# Altium PCB 400432.PcbDoc (part 7 of 7)
Units mm, origin at the board's own origin, x right, y up, seen from the top; angles counter-clockwise.
Board outline 136.53 x 63.5 mm, 4 copper layers (Top Layer, Mid-Layer 1, Mid-Layer 2, Bottom Layer), stack 1.505 mm thick; 354 components, 245 nets, 1470 pads, 1957 vias.
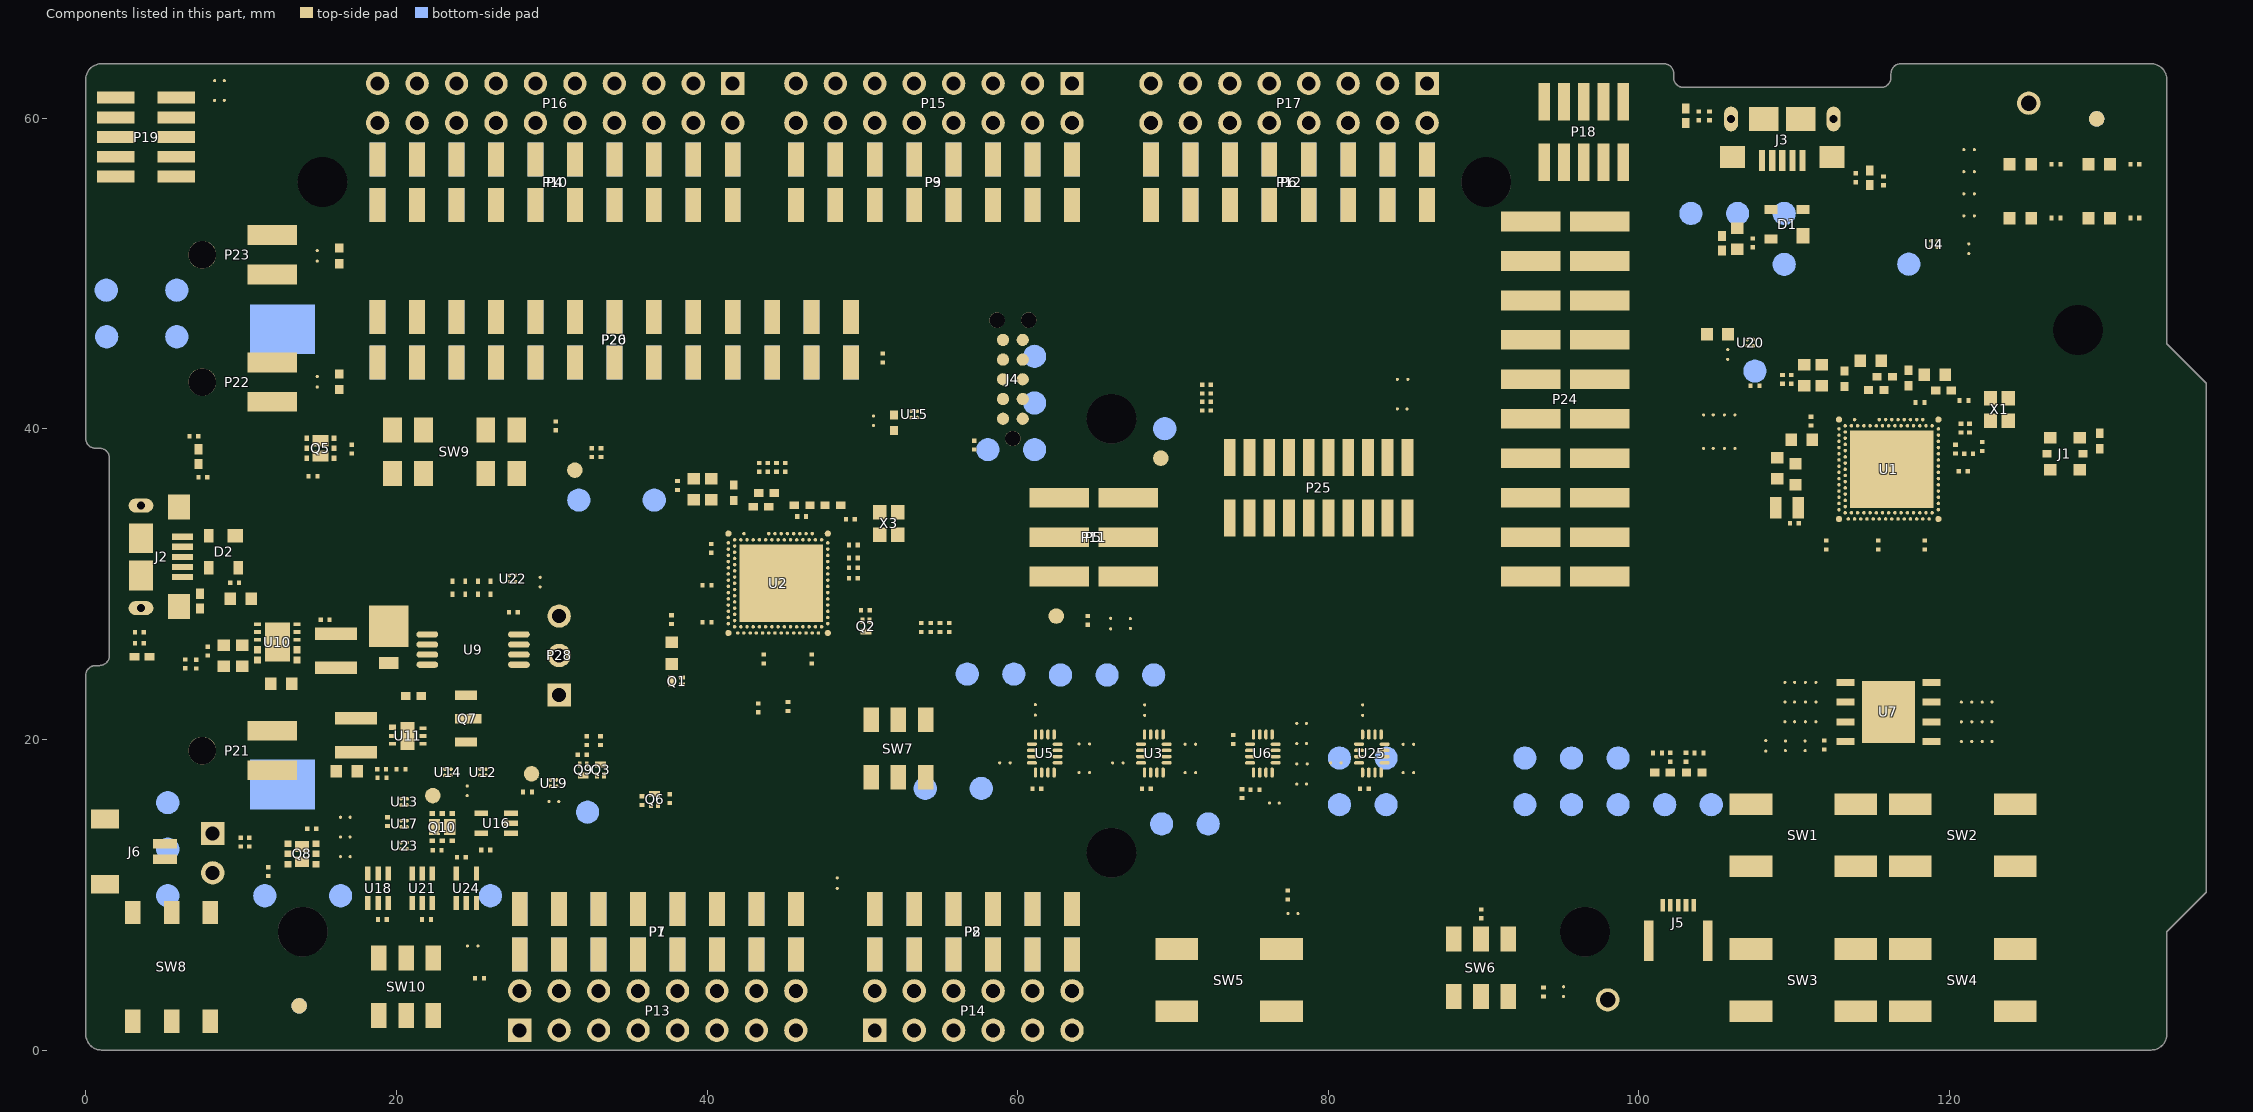
[diagram p8: the components of this part, seen from the top]

## Silkscreen, mask and mechanical layers (free items; w line width, h text height) (continued)
Bottom Overlay:
  drawing of 1258 lines, arcs and shapes, not listed
  text "www.segger.com" at 90.254,62.989 h1.68 r180
  text "J-Link" at 90.173,61.839 h1.45 r180
  text "Technology" at 94.925,61.839 h1.45 r180
  text "TM" at 93.642,61.417 h0.94 r180
  text "S" at 93.856,59.98 h1.35 r180
  text "E" at 94.745,59.98 h1.35 r180
  text "G" at 95.529,59.98 h1.35 r180
  text "G" at 96.52,59.98 h1.35 r180
  text "E" at 97.544,59.98 h1.35 r180
  text "R" at 98.379,59.98 h1.35 r180
  text "P1.03" at 19.303,53.111 h1.65 r90
  text "P1.02" at 21.843,53.111 h1.65 r90
  text "P0.27" at 24.383,53.111 h1.65 r90
  text "GND" at 26.924,53.111 h1.65 r90
  text "P1.15" at 29.463,53.111 h1.65 r90
  text "P1.14" at 32.003,53.111 h1.65 r90
  text "P1.13" at 34.543,53.111 h1.65 r90
  text "P1.12" at 37.083,53.111 h1.65 r90
  text "P1.11" at 39.623,53.111 h1.65 r90
  text "P1.10" at 42.163,53.111 h1.65 r90
  text "P1.09" at 46.227,53.111 h1.65 r90
  text "P1.08 (D6)" at 48.59,53.111 h1.65 r90
  text "P1.07 (D5)" at 51.308,53.111 h1.65 r90
  text "P1.06 (D4)" at 53.848,53.111 h1.65 r90
  text "P1.05 (D3)" at 56.388,53.111 h1.65 r90
  text "P1.04 (D2)" at 58.928,53.111 h1.65 r90
  text "P1.01 (D1)" at 61.468,53.111 h1.65 r90
  text "P1.00 (ARDUINO D0)" at 64.008,53.111 h1.65 r90
  text "P0.10" at 69.088,53.111 h1.78 r90
  text "P0.09" at 71.628,53.111 h1.78 r90
  text "P0.08" at 74.168,53.111 h1.78 r90
  text "P0.07" at 76.708,53.111 h1.78 r90
  text "P0.03" at 79.248,53.111 h1.78 r90
  text "P0.02" at 81.788,53.111 h1.78 r90
  text "P0.01" at 84.328,53.111 h1.78 r90
  text "P0.00" at 86.843,53.111 h1.78 r90
  text "(SCL)" at 20.421,52.07 h1.65 r90
  text "(SDA)" at 22.961,52.07 h1.65 r90
  text "(AREF)" at 25.501,52.07 h1.65 r90
  text "(D13)" at 30.581,52.07 h1.65 r90
  text "(D12)" at 33.121,52.07 h1.65 r90
  text "(D11)" at 35.661,52.07 h1.65 r90
  text "(D10)" at 38.201,52.07 h1.65 r90
  text "(D9)" at 40.741,52.07 h1.65 r90
  text "(D8)" at 43.281,52.07 h1.65 r90
  text "(D7)" at 47.345,52.07 h1.65 r90
  text "P0.16" at 75.654,48.58 h1.91 r180
  text "DIO3" at 82.813,48.58 h1.91 r180
  text "SB10/20" at 89.065,48.58 h1.91 r180
  text "P0.15" at 75.654,45.888 h1.91 r180
  text "DIO2" at 82.819,45.888 h1.91 r180
  text "SB15/25" at 89.065,45.888 h1.91 r180
  text "GPIO" at 121.549,44.265 h1.78 r180
  text "0R" at 125.705,43.993 h1.27 r180
  text "GPIO" at 96.368,43.424 h1.78 r180
  text "MEM" at 101.041,43.424 h1.78 r180
  text "P0.14" at 75.654,43.195 h1.91 r180
  text "DIO1" at 82.915,43.195 h1.91 r180
  text "SB14/24" at 89.065,43.195 h1.91 r180
  text "NFC2" at 114.002,43.155 h1.91 r180
  text "P0.03" at 107.036,43.129 h1.91 r180
  text "N.C" at 122.657,41.199 h1.27 r180
  text "SB1x" at 99.238,41.138 h1.27 r180
  text "P0.13" at 75.654,40.503 h1.91 r180
  text "DIO0" at 82.818,40.503 h1.91 r180
  text "SB12/22" at 89.065,40.503 h1.91 r180
  text "NFC" at 126.705,40.292 h1.78 r180
  text "P0.09" at 24.078,40.018 h1.91 r180
  text "Button 4" at 29.754,40.018 h1.91 r180
  text "PIN" at 101.93,38.979 h1.78 r180
  text "SB2x" at 99.238,38.852 h1.27 r180
  text "NFC1" at 114.098,38.583 h1.91 r180
  text "P0.02" at 107.036,38.557 h1.91 r180
  text "P0.17" at 75.654,37.81 h1.91 r180
  text "CLK" at 82.994,37.81 h1.91 r180
  text "SB11/21" at 89.065,37.81 h1.91 r180
  text "P0.08" at 24.078,37.326 h1.91 r180
  text "Button 3" at 29.771,37.326 h1.91 r180
  text "PIN" at 123.759,37.218 h1.78 r180
  text "P0.18" at 75.654,35.118 h1.91 r180
  text "CS" at 83.602,35.118 h1.91 r180
  text "SB13/23" at 89.065,35.118 h1.91 r180
  text "SWDCLK" at 109.601,35.001 h1.91 r180
  text "P0.24" at 24.078,34.634 h1.91 r180
  text "Button 2" at 29.777,34.634 h1.91 r180
  text "P0.31" at 75.654,32.426 h1.91 r180
  text "LED 4" at 82.373,32.426 h1.91 r180
  text "SB8" at 89.624,32.426 h1.91 r180
  text "SWDIO" at 110.49,32.311 h1.91 r180
  text "P0.23" at 24.078,31.941 h1.91 r180
  text "Button 1" at 29.873,31.941 h1.91 r180
  text "P0.30" at 75.654,29.733 h1.91 r180
  text "LED 3" at 82.39,29.733 h1.91 r180
  text "SB7" at 89.624,29.733 h1.91 r180
  text "RESET" at 110.566,29.621 h1.91 r180
  text "SB4" at 38.048,29.249 h1.91 r180
  text "P0.01" at 24.078,27.903 h1.91 r180
  text "XL2" at 31.608,27.903 h1.91 r180
  text "P0.29" at 75.654,27.041 h1.91 r180
  text "LED 2" at 82.396,27.041 h1.91 r180
  text "SB6" at 89.624,27.041 h1.91 r180
  text "GPIO" at 44.792,26.854 h1.78 r180
  text "P0.11" at 107.036,26.848 h1.91 r180
  text "SWO" at 114.428,26.848 h1.91 r180
  text "SB2" at 38.048,26.556 h1.91 r180
  text "VDD" at 101.168,25.212 h1.78 r180
  text "IF / MCU" at 120.752,24.74 h1.78 r180
  text "P0.28" at 75.654,24.348 h1.91 r180
  text "LED 1" at 82.492,24.348 h1.91 r180
  text "SB5" at 89.624,24.348 h1.91 r180
  text "RXD" at 114.428,24.187 h1.91 r180
  text "P1.00" at 107.036,24.165 h1.91 r180
  text "SB3" at 38.048,23.864 h1.91 r180
  text "P0.00" at 24.078,22.518 h1.91 r180
  text "XL1" at 31.704,22.518 h1.91 r180
  text "PIN" at 50.355,22.346 h1.78 r180
  text "GPIO" at 75.594,21.859 h1.99 r180
  text "Function" at 81.064,21.859 h1.99 r180
  text "Short" at 90.14,21.859 h1.99 r180
  text "HW" at 98.776,21.859 h1.99 r180
  text "P0.10" at 107.036,21.482 h1.91 r180
  text "CTS" at 114.428,21.482 h1.91 r180
  text "SB1" at 38.048,21.172 h1.91 r180
  text "IF OFF" at 127.61,20.066 h1.78 r180
  text "TXD" at 114.428,18.821 h1.91 r180
  text "P1.01" at 107.036,18.799 h1.91 r180
  text "GPIO" at 24.019,18.682 h1.99 r180
  text "Function" at 29.489,18.682 h1.99 r180
  text "Short" at 38.565,18.682 h1.99 r180
  text "HW" at 47.201,18.682 h1.99 r180
  text "P0.11" at 107.036,16.116 h1.91 r180
  text "RTS" at 114.428,16.116 h1.91 r180
  text "GPIO" at 121.006,16.104 h1.78 r180
  text "P0.04 (A0)" at 51.181,16.019 h1.65 r90
  text "P0.05 (A1)" at 52.984,16.019 h1.65 r90
  text "P0.06 (A2)" at 56.261,16.019 h1.65 r90
  text "P0.07 (A3)" at 58.801,16.019 h1.65 r90
  text "P0.25 (A4)" at 61.335,16.019 h1.65 r90
  text "P0.26 (A5)" at 63.881,16.019 h1.65 r90
  text "RESET" at 33.522,14.272 h1.65 r90
  text "RXD" at 114.428,13.456 h1.91 r180
  text "P0.22" at 107.036,13.433 h1.91 r180
  text "GND" at 43.605,13.103 h1.65 r90
  text "GND" at 41.142,12.95 h1.65 r90
  text "N.C." at 46.272,12.95 h1.78 r90
  text "VDD" at 28.448,12.87 h1.65 r90
  text "VDD" at 30.988,12.87 h1.65 r90
  text "VDD" at 36.068,12.87 h1.65 r90
  text "5V" at 38.633,11.828 h1.65 r90
  text "P0.21" at 107.036,10.751 h1.91 r180
  text "CTS" at 114.428,10.751 h1.91 r180
  text "TXD" at 114.428,8.09 h1.91 r180
  text "P0.20" at 107.036,8.068 h1.91 r180
  text "P0.19" at 107.036,5.385 h1.91 r180
  text "RTS" at 114.428,5.385 h1.91 r180
  text "HW" at 120.371,3.296 h1.99 r180
  text "GPIO" at 107.014,2.896 h1.99 r180
  text "Function" at 112.484,2.896 h1.99 r180
Board Outline:
  lines w0.254: 82.093,0 97.36,0 132.969,0 ccw(c132.969,1.016) 133.985,1.016 133.985,7.62 136.525,10.16 136.525,42.926 133.985,45.466 133.985,62.484 ccw(c132.969,62.484) 132.969,63.5 116.859,63.5 ccw(c116.859,62.865) 116.224,62.865 116.224,62.611 cw(c115.589,62.611) 115.589,61.976 102.869,61.976 cw(c102.869,62.611) 102.234,62.611 102.234,62.865 ccw(c101.599,62.865) 101.599,63.5 1.016,63.5 ccw(c1.016,62.484) 0,62.484 0,39.38 ccw(c0.635,39.38) 0.635,38.745 0.889,38.745 cw(c0.889,38.11) 1.524,38.11 1.524,25.39 cw(c0.889,25.39) 0.889,24.755 0.635,24.755 ccw(c0.635,24.12) 0,24.12 0,1.016 ccw(c1.016,1.016) 1.016,0 82.099,0
Mechanical 4:
  lines w0.165: 6.232,31.75 6.253,31.75 cw(c6.253,29.378) 7.93,31.055 ; 6.232,32.4 ccw(c6.232,34.797) 7.927,33.102 7.93,33.105 8.238,32.797 ccw(c9.601,34.161) 9.601,32.233 ; 15.173,33.494 cw(c15.989,32.678) 15.989,33.832 32.91,33.832 ; 37.513,38.513 cw(c38.749,37.276) 38.739,39.025 43.409,39.025 ; 37.516,38.51 33.579,34.573 cw(c32.656,35.496) 32.656,34.191 ; 37.689,38.076 cw(c38.926,36.84) 38.915,38.588 43.279,38.588 ; 37.692,38.074 33.833,34.214 cw(c32.91,35.137) 32.91,33.832 ; 43.292,38.588 cw(c43.279,37.233) 44.634,37.226 ; 43.409,39.018 cw(c43.393,37.27) 45.141,37.262 ; 44.633,37.215 ccw(c45.095,37.198) 44.882,36.787 cw(c44.745,36.346) 45.207,36.329 ; 108.506,54.11 108.603,54.013 cw(c106.807,52.217) 109.347,52.217 109.347,43.71 cw(c109,43.71) 109.245,43.465 ; 108.529,54.1 109.075,54.646 ; 109.075,54.645 ccw(c108.716,55.005) 109.224,55.005 109.224,57.506 ; 109.245,42.895 cw(c109,42.65) 109.347,42.65 109.347,42.443 ccw(c110.254,42.443) 109.613,41.802 ccw(c111.13,43.319) 111.13,41.173 112.421,41.173 cw(c112.421,40.133) 113.157,40.869 cw(c112.866,40.577) 113.278,40.577 113.278,40.189 113.284,40.195 ; 109.804,42.895 ccw(c110.05,42.65) 109.703,42.65 109.703,42.443 ccw(c110.254,42.443) 109.864,42.053 ccw(c111.13,43.32) 111.13,41.529 112.421,41.529 cw(c112.421,40.133) 113.408,41.12 cw(c113.034,40.746) 113.563,40.746 113.563,40.465 ccw(c113.953,40.465) 113.678,40.189 ; 109.804,43.465 cw(c110.049,43.71) 109.703,43.71 109.703,50.578 109.703,52.205 cw(c112.243,52.205) 110.447,54.001 110.556,54.11 110.021,54.645 cw(c110.38,55.005) 109.872,55.005 109.872,57.515 ; 7.93,31.055 8.151,31.276 cw(c9.601,29.826) 9.601,31.877 12.357,31.877 ccw(c12.357,34.767) 14.401,32.724 14.793,33.116 ; 7.93,31.055 7.93,31.055 ; 9.601,32.233 12.355,32.233 ccw(c12.355,34.773) 14.151,32.977 14.588,33.414 ; 9.601,32.233 9.601,32.233 ; 14.588,33.414 14.588,33.414 ; 14.588,33.414 14.84,33.666 cw(c16.106,32.4) 16.106,34.191 32.656,34.191 ; 14.793,33.116 14.793,33.116 ; 14.793,33.116 15.102,33.425 cw(c16.063,32.464) 15.107,33.43 ; 15.107,33.43 15.107,33.43 ; 32.656,34.191 32.656,34.191 ; 32.91,33.832 32.91,33.832
  lines w0.762: 120.778,38.389 126.261,38.389
  text "90ohm differensial impedance" at 97.307,57.785 h1.02
  text "50ohm impedance" at 118.77,39.345 h1.02
  text "90ohm differensial impedance" at 16.053,32.004 h1.02
Top Assembly:
  circle w0.1: c128.27,46.355 r1.6
  circle w0.1: c96.52,7.62 r1.6
  circle w0.1: c66.04,12.7 r1.6
  circle w0.1: c13.97,7.62 r1.6
  circle w0.1: c15.24,55.88 r1.6
  circle w0.1: c66.04,40.64 r1.6
  circle w0.1: c90.17,55.88 r1.6
  lines w0.254: 78.867,6.502 86.867,6.502 86.867,14.502 78.867,14.502 78.867,6.502 ; 87.427,14.681 99.427,14.681 99.427,26.681 87.427,26.681 87.427,14.681
Bottom Assembly:
  drawing of 47 lines, arcs and shapes, not listed
  text "Bat1" at 11.709,49.301 h0.64 r180
  text "+" at 15.088,15.35 h1.78
Mechanical 24:
  lines w0.165: 6.232,31.75 6.253,31.75 cw(c6.253,29.378) 7.93,31.055 ; 6.232,32.4 ccw(c6.232,34.797) 7.927,33.102 7.93,33.105 8.238,32.797 ccw(c9.601,34.161) 9.601,32.233 ; 15.173,33.494 cw(c15.989,32.678) 15.989,33.832 32.91,33.832 ; 37.513,38.513 cw(c38.749,37.276) 38.739,39.025 43.409,39.025 ; 37.516,38.51 33.579,34.573 cw(c32.656,35.496) 32.656,34.191 ; 37.689,38.076 cw(c38.926,36.84) 38.915,38.588 43.279,38.588 ; 37.692,38.074 33.833,34.214 cw(c32.91,35.137) 32.91,33.832 ; 43.292,38.588 cw(c43.279,37.233) 44.634,37.226 ; 43.409,39.018 cw(c43.393,37.27) 45.141,37.262 ; 44.633,37.215 ccw(c45.095,37.198) 44.882,36.787 cw(c44.745,36.346) 45.207,36.329 ; 108.506,54.11 108.603,54.013 cw(c106.807,52.217) 109.347,52.217 109.347,43.71 cw(c109,43.71) 109.245,43.465 ; 108.529,54.1 109.075,54.646 ; 109.075,54.645 ccw(c108.716,55.005) 109.224,55.005 109.224,57.506 ; 109.245,42.895 cw(c109,42.65) 109.347,42.65 109.347,42.443 ccw(c110.254,42.443) 109.613,41.802 ccw(c111.13,43.319) 111.13,41.173 112.421,41.173 cw(c112.421,40.133) 113.157,40.869 cw(c112.866,40.577) 113.278,40.577 113.278,40.189 113.284,40.195 ; 109.804,42.895 ccw(c110.05,42.65) 109.703,42.65 109.703,42.443 ccw(c110.254,42.443) 109.864,42.053 ccw(c111.13,43.32) 111.13,41.529 112.421,41.529 cw(c112.421,40.133) 113.408,41.12 cw(c113.034,40.746) 113.563,40.746 113.563,40.465 ccw(c113.953,40.465) 113.678,40.189 ; 109.804,43.465 cw(c110.049,43.71) 109.703,43.71 109.703,50.578 109.703,52.205 cw(c112.243,52.205) 110.447,54.001 110.556,54.11 110.021,54.645 cw(c110.38,55.005) 109.872,55.005 109.872,57.515 ; 7.93,31.055 8.151,31.276 cw(c9.601,29.826) 9.601,31.877 12.357,31.877 ccw(c12.357,34.767) 14.401,32.724 14.793,33.116 ; 7.93,31.055 7.93,31.055 ; 9.601,32.233 12.355,32.233 ccw(c12.355,34.773) 14.151,32.977 14.588,33.414 ; 9.601,32.233 9.601,32.233 ; 14.588,33.414 14.588,33.414 ; 14.588,33.414 14.84,33.666 cw(c16.106,32.4) 16.106,34.191 32.656,34.191 ; 14.793,33.116 14.793,33.116 ; 14.793,33.116 15.102,33.425 cw(c16.063,32.464) 15.107,33.43 ; 15.107,33.43 15.107,33.43 ; 32.656,34.191 32.656,34.191 ; 32.91,33.832 32.91,33.832
  lines w0.762: 120.778,38.389 126.261,38.389
  text "90ohm differensial impedance" at 97.307,57.785 h1.02
  text "50ohm impedance" at 118.77,39.345 h1.02
  text "90ohm differensial impedance" at 16.053,32.004 h1.02

## Dimensions
132.969,62.484 to 136.175,65.69 on Mechanical 3
0,1.016 to 90.17,55.88 on Mechanical 3
0,1.016 to 133.985,1.016 on Mechanical 3
0,1.016 to 136.525,10.16 on Mechanical 3
0,1.016 to 13.97,7.62 on Mechanical 3
0,1.016 to 15.24,55.88 on Mechanical 3
0,1.016 to 66.04,12.7 on Mechanical 3
0,1.016 to 96.52,7.62 on Mechanical 3
132.969,0 to 101.599,63.5 on Mechanical 3
132.969,0 to 96.52,7.62 on Mechanical 3
132.969,0 to 66.04,12.7 on Mechanical 3
132.969,0 to 66.04,40.64 on Mechanical 3
132.969,0 to 15.24,55.88 on Mechanical 3
132.969,0 to 128.27,46.355 on Mechanical 3
0,1.016 to 128.27,46.355 on Mechanical 3

## Text inside footprints (layer, text, board x,y; h text height)
Bat1: Bottom Overlay "+" at 14.775,15.65 h1.78 r270
P18: Top Overlay "1" at 93.744,54.656 h1.02
P19: Top Overlay "1" at 7.569,55.728 h1.02
P25: Top Overlay "1" at 84.887,39.599 h1.02
SW9: Top Overlay "NN" at 29.449,37.656 h1.02 r90
U1: Top Component Info "AG1" at 112.537,35.149 h0.08; Top Component Info "AJ1" at 112.537,34.749 h0.08; Top Component Info "AH2" at 112.87,34.949 h0.08; Top Component Info "AK4" at 113.569,34.349 h0.08; Top Component Info "AL5" at 113.763,33.949 h0.08; Top Component Info "AK2" at 113.169,34.375 h0.08; Top Component Info "AL3" at 113.363,33.949 h0.08; Top Component Info "V2" at 112.95,36.949 h0.08; Top Component Info "Y2" at 112.95,36.549 h0.08; Top Component Info "AA1" at 112.543,36.349 h0.08; Top Component Info "W1" at 112.609,36.749 h0.08; Top Component Info "AD2" at 112.87,35.749 h0.08; Top Component Info "AC1" at 112.537,35.949 h0.08; Top Component Info "AE1" at 112.556,35.549 h0.08; Top Component Info "AB2" at 112.87,36.149 h0.08; Top Component Info "H2" at 112.95,38.949 h0.08; Top Component Info "J1" at 112.609,38.749 h0.08; Top Component Info "G1" at 112.609,39.149 h0.08; Top Component Info "M2" at 112.95,38.149 h0.08; Top Component Info "L1" at 112.589,38.349 h0.08; Top Component Info "P2" at 112.95,37.749 h0.08; Top Component Info "R1" at 112.622,37.549 h0.08; Top Component Info "N1" at 112.628,37.949 h0.08; Top Component Info "K2" at 112.95,38.549 h0.08; Top Component Info "D2" at 112.95,39.749 h0.08; Top Component Info "E1" at 112.628,39.549 h0.08; Top Component Info "C1" at 112.609,39.949 h0.08; Top Component Info "B4" at 113.609,40.35 h0.08; Top Component Info "A5" at 113.805,40.749 h0.08; Top Component Info "B2" at 113.224,40.336 h0.08; Top Component Info "AK14" at 115.54,34.349 h0.08; Top Component Info "AL13" at 115.333,33.949 h0.08; Top Component Info "AK10" at 114.74,34.349 h0.08; Top Component Info "AL11" at 114.933,33.949 h0.08; Top Component Info "AK12" at 115.14,34.349 h0.08; Top Component Info "AK8" at 114.369,34.35 h0.08; Top Component Info "AL7" at 114.163,33.949 h0.08; Top Component Info "AL9" at 114.533,33.949 h0.08; Top Component Info "AL15" at 115.733,33.949 h0.08; Top Component Info "B14" at 115.579,40.35 h0.08; Top Component Info "A13" at 115.376,40.749 h0.08; Top Component Info "B10" at 114.779,40.35 h0.08; Top Component Info "B12" at 115.179,40.35 h0.08; Top Component Info "B8" at 114.409,40.35 h0.08; Top Component Info "A15" at 115.776,40.749 h0.08; Top Component Info "AK24" at 117.54,34.349 h0.08; Top Component Info "AL23" at 117.333,33.949 h0.08; Top Component Info "AL25" at 117.733,33.949 h0.08; Top Component Info "AK20" at 116.74,34.349 h0.08; Top Component Info "AL21" at 116.933,33.949 h0.08; Top Component Info "AK18" at 116.34,34.35 h0.08; Top Component Info "AL17" at 116.133,33.949 h0.08; Top Component Info "AL19" at 116.533,33.949 h0.08; Top Component Info "AK22" at 117.14,34.349 h0.08; Top Component Info "B24" at 117.579,40.35 h0.08; Top Component Info "A23" at 117.376,40.749 h0.08; Top Component Info "A25" at 117.776,40.749 h0.08; Top Component Info "B20" at 116.779,40.35 h0.08; Top Component Info "A21" at 116.976,40.749 h0.08; Top Component Info "B18" at 116.379,40.35 h0.08; Top Component Info "A17" at 116.176,40.749 h0.08; Top Component Info "A19" at 116.576,40.749 h0.08; Top Component Info "B22" at 117.179,40.35 h0.08; Top Component Info "AL29" at 118.533,33.949 h0.08; Top Component Info "AL27" at 118.133,33.949 h0.08; Top Component Info "AK28" at 118.34,34.35 h0.08; Top Component Info "AG31" at 119.4,35.149 h0.08; Top Component Info "AJ31" at 119.4,34.749 h0.08; Top Component Info "AK30" at 118.74,34.349 h0.08; Top Component Info "U31" at 119.4,37.149 h0.08; Top Component Info "AA31" at 119.4,36.349 h0.08; Top Component Info "W31" at 119.4,36.749 h0.08; Top Component Info "AC31" at 119.4,35.949 h0.08; Top Component Info "AE31" at 119.4,35.549 h0.08; Top Component Info "J31" at 119.4,38.749 h0.08; Top Component Info "G31" at 119.4,39.149 h0.08; Top Component Info "L31" at 119.4,38.349 h0.08; Top Component Info "R31" at 119.4,37.549 h0.08; Top Component Info "N31" at 119.4,37.949 h0.08; Top Component Info "E31" at 119.4,39.549 h0.08; Top Component Info "C31" at 119.4,39.949 h0.08; Top Component Info "B30" at 118.779,40.35 h0.08; Top Component Info "A27" at 118.176,40.749 h0.08; Top Component Info "B28" at 118.379,40.35 h0.08; Top Component Info "AF2" at 112.87,35.349 h0.08; Top Component Info "F2" at 112.95,39.349 h0.08; Top Component Info "T2" at 112.95,37.349 h0.08; Top Component Info "AK6" at 113.969,34.35 h0.08; Top Component Info "B6" at 114.009,40.35 h0.08; Top Component Info "AK26" at 117.94,34.35 h0.08; Top Component Info "AK16" at 115.94,34.35 h0.08; Top Component Info "B26" at 117.979,40.35 h0.08; Top Component Info "B16" at 115.979,40.35 h0.08
U2: Top Component Info "AG1" at 41.035,27.808 h0.08; Top Component Info "AJ1" at 41.035,27.408 h0.08; Top Component Info "AH2" at 41.368,27.608 h0.08; Top Component Info "AK4" at 42.068,27.009 h0.08; Top Component Info "AL5" at 42.261,26.609 h0.08; Top Component Info "AK2" at 41.668,27.035 h0.08; Top Component Info "AL3" at 41.861,26.609 h0.08; Top Component Info "V2" at 41.448,29.608 h0.08; Top Component Info "U1" at 41.107,29.808 h0.08; Top Component Info "Y2" at 41.448,29.208 h0.08; Top Component Info "AA1" at 41.042,29.008 h0.08; Top Component Info "W1" at 41.107,29.408 h0.08; Top Component Info "AD2" at 41.368,28.408 h0.08; Top Component Info "AC1" at 41.035,28.608 h0.08; Top Component Info "AE1" at 41.055,28.208 h0.08; Top Component Info "AB2" at 41.368,28.808 h0.08; Top Component Info "H2" at 41.448,31.608 h0.08; Top Component Info "J1" at 41.107,31.408 h0.08; Top Component Info "G1" at 41.107,31.808 h0.08; Top Component Info "M2" at 41.448,30.808 h0.08; Top Component Info "L1" at 41.087,31.008 h0.08; Top Component Info "P2" at 41.448,30.408 h0.08; Top Component Info "R1" at 41.12,30.208 h0.08; Top Component Info "N1" at 41.127,30.608 h0.08; Top Component Info "K2" at 41.448,31.208 h0.08; Top Component Info "D2" at 41.448,32.408 h0.08; Top Component Info "E1" at 41.127,32.208 h0.08; Top Component Info "C1" at 41.107,32.608 h0.08; Top Component Info "B4" at 42.107,33.009 h0.08; Top Component Info "A5" at 42.304,33.409 h0.08; Top Component Info "B2" at 41.723,32.995 h0.08; Top Component Info "AK14" at 44.038,27.009 h0.08; Top Component Info "AL13" at 43.832,26.609 h0.08; Top Component Info "AK10" at 43.238,27.008 h0.08; Top Component Info "AL11" at 43.432,26.609 h0.08; Top Component Info "AK12" at 43.638,27.009 h0.08; Top Component Info "AK8" at 42.868,27.009 h0.08; Top Component Info "AL7" at 42.661,26.609 h0.08; Top Component Info "AL9" at 43.032,26.609 h0.08; Top Component Info "AL15" at 44.232,26.609 h0.08; Top Component Info "B14" at 44.078,33.009 h0.08; Top Component Info "A13" at 43.874,33.408 h0.08; Top Component Info "B10" at 43.278,33.009 h0.08; Top Component Info "B12" at 43.678,33.009 h0.08; Top Component Info "B8" at 42.907,33.009 h0.08; Top Component Info "A15" at 44.274,33.409 h0.08; Top Component Info "AK24" at 46.038,27.009 h0.08; Top Component Info "AL23" at 45.832,26.609 h0.08; Top Component Info "AL25" at 46.232,26.609 h0.08; Top Component Info "AK20" at 45.238,27.008 h0.08; Top Component Info "AL21" at 45.432,26.609 h0.08; Top Component Info "AK18" at 44.838,27.009 h0.08; Top Component Info "AL17" at 44.632,26.609 h0.08; Top Component Info "AL19" at 45.032,26.609 h0.08; Top Component Info "AK22" at 45.638,27.009 h0.08; Top Component Info "B24" at 46.078,33.009 h0.08; Top Component Info "A23" at 45.874,33.408 h0.08; Top Component Info "A25" at 46.274,33.409 h0.08; Top Component Info "B20" at 45.278,33.009 h0.08; Top Component Info "A21" at 45.474,33.408 h0.08; Top Component Info "B18" at 44.878,33.009 h0.08; Top Component Info "A17" at 44.674,33.409 h0.08; Top Component Info "A19" at 45.074,33.409 h0.08; Top Component Info "B22" at 45.678,33.009 h0.08; Top Component Info "AL29" at 47.032,26.609 h0.08; Top Component Info "AL27" at 46.632,26.609 h0.08; Top Component Info "AK28" at 46.838,27.009 h0.08; Top Component Info "AG31" at 47.898,27.808 h0.08; Top Component Info "AJ31" at 47.898,27.408 h0.08; Top Component Info "AK30" at 47.238,27.009 h0.08; Top Component Info "U31" at 47.898,29.808 h0.08; Top Component Info "AA31" at 47.898,29.008 h0.08; Top Component Info "W31" at 47.898,29.408 h0.08; Top Component Info "AC31" at 47.898,28.608 h0.08; Top Component Info "AE31" at 47.898,28.208 h0.08; Top Component Info "J31" at 47.898,31.408 h0.08; Top Component Info "G31" at 47.898,31.808 h0.08; Top Component Info "L31" at 47.898,31.008 h0.08; Top Component Info "R31" at 47.898,30.208 h0.08; Top Component Info "N31" at 47.898,30.608 h0.08; Top Component Info "E31" at 47.898,32.208 h0.08; Top Component Info "C31" at 47.898,32.608 h0.08; Top Component Info "B30" at 47.278,33.009 h0.08; Top Component Info "A27" at 46.674,33.409 h0.08; Top Component Info "B28" at 46.878,33.009 h0.08; Top Component Info "AF2" at 41.368,28.008 h0.08; Top Component Info "F2" at 41.448,32.008 h0.08; Top Component Info "T2" at 41.448,30.008 h0.08; Top Component Info "AK6" at 42.468,27.009 h0.08; Top Component Info "B6" at 42.507,33.009 h0.08; Top Component Info "AK26" at 46.438,27.009 h0.08; Top Component Info "AK16" at 44.438,27.009 h0.08; Top Component Info "B26" at 46.478,33.009 h0.08; Top Component Info "B16" at 44.478,33.009 h0.08